# Altium PCB PCB2 (1).PcbDoc
Units mm, origin at the board's own origin, x right, y up, seen from the top; angles counter-clockwise.
Board outline 101.6 x 109.09 mm, 2 copper layers (Top Layer, Bottom Layer); 25 components, 22 nets, 119 pads, 0 vias.
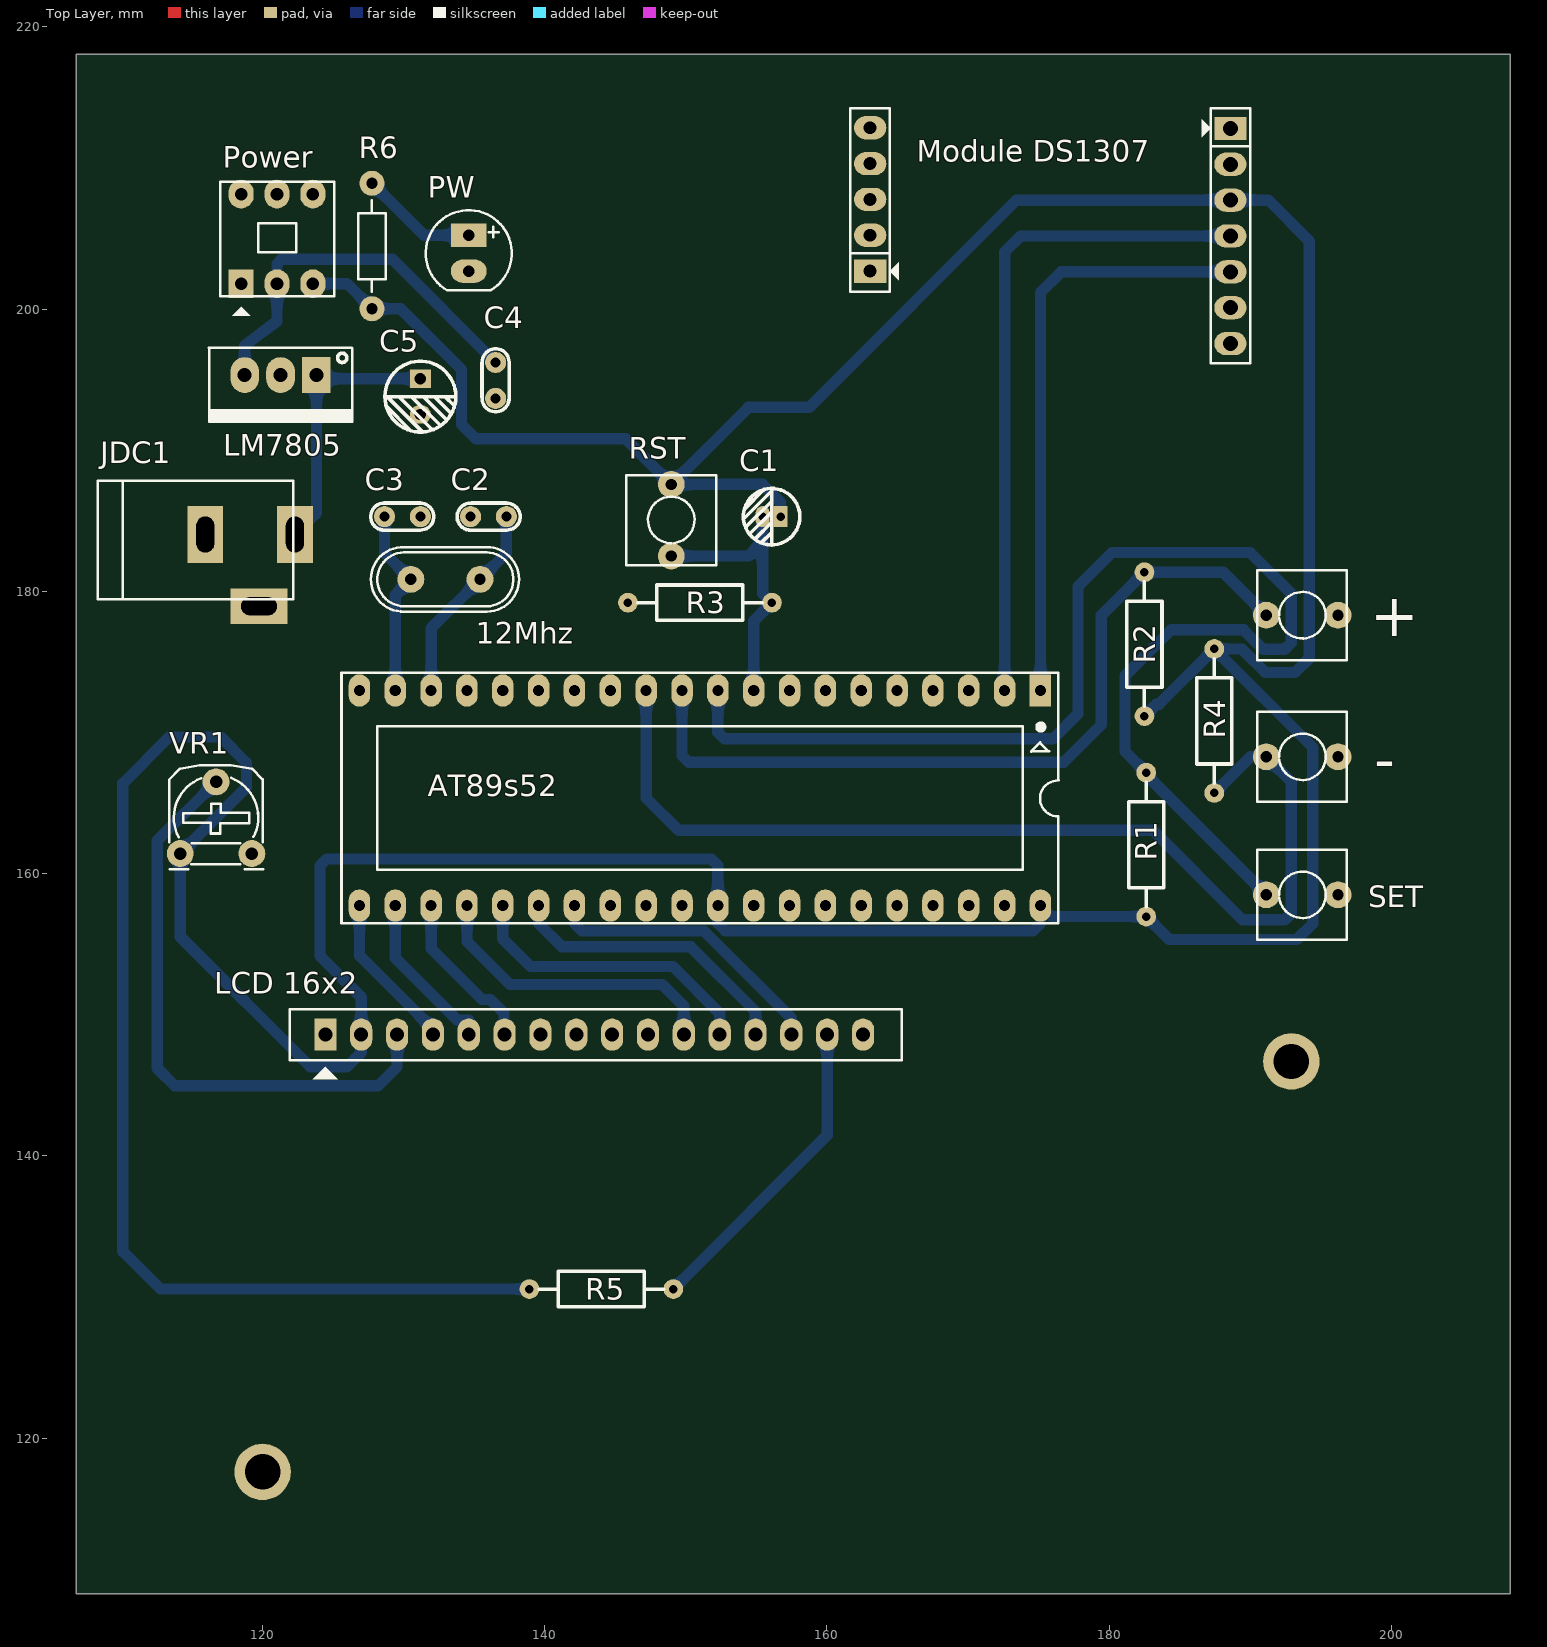
[diagram p0: Top Layer view]
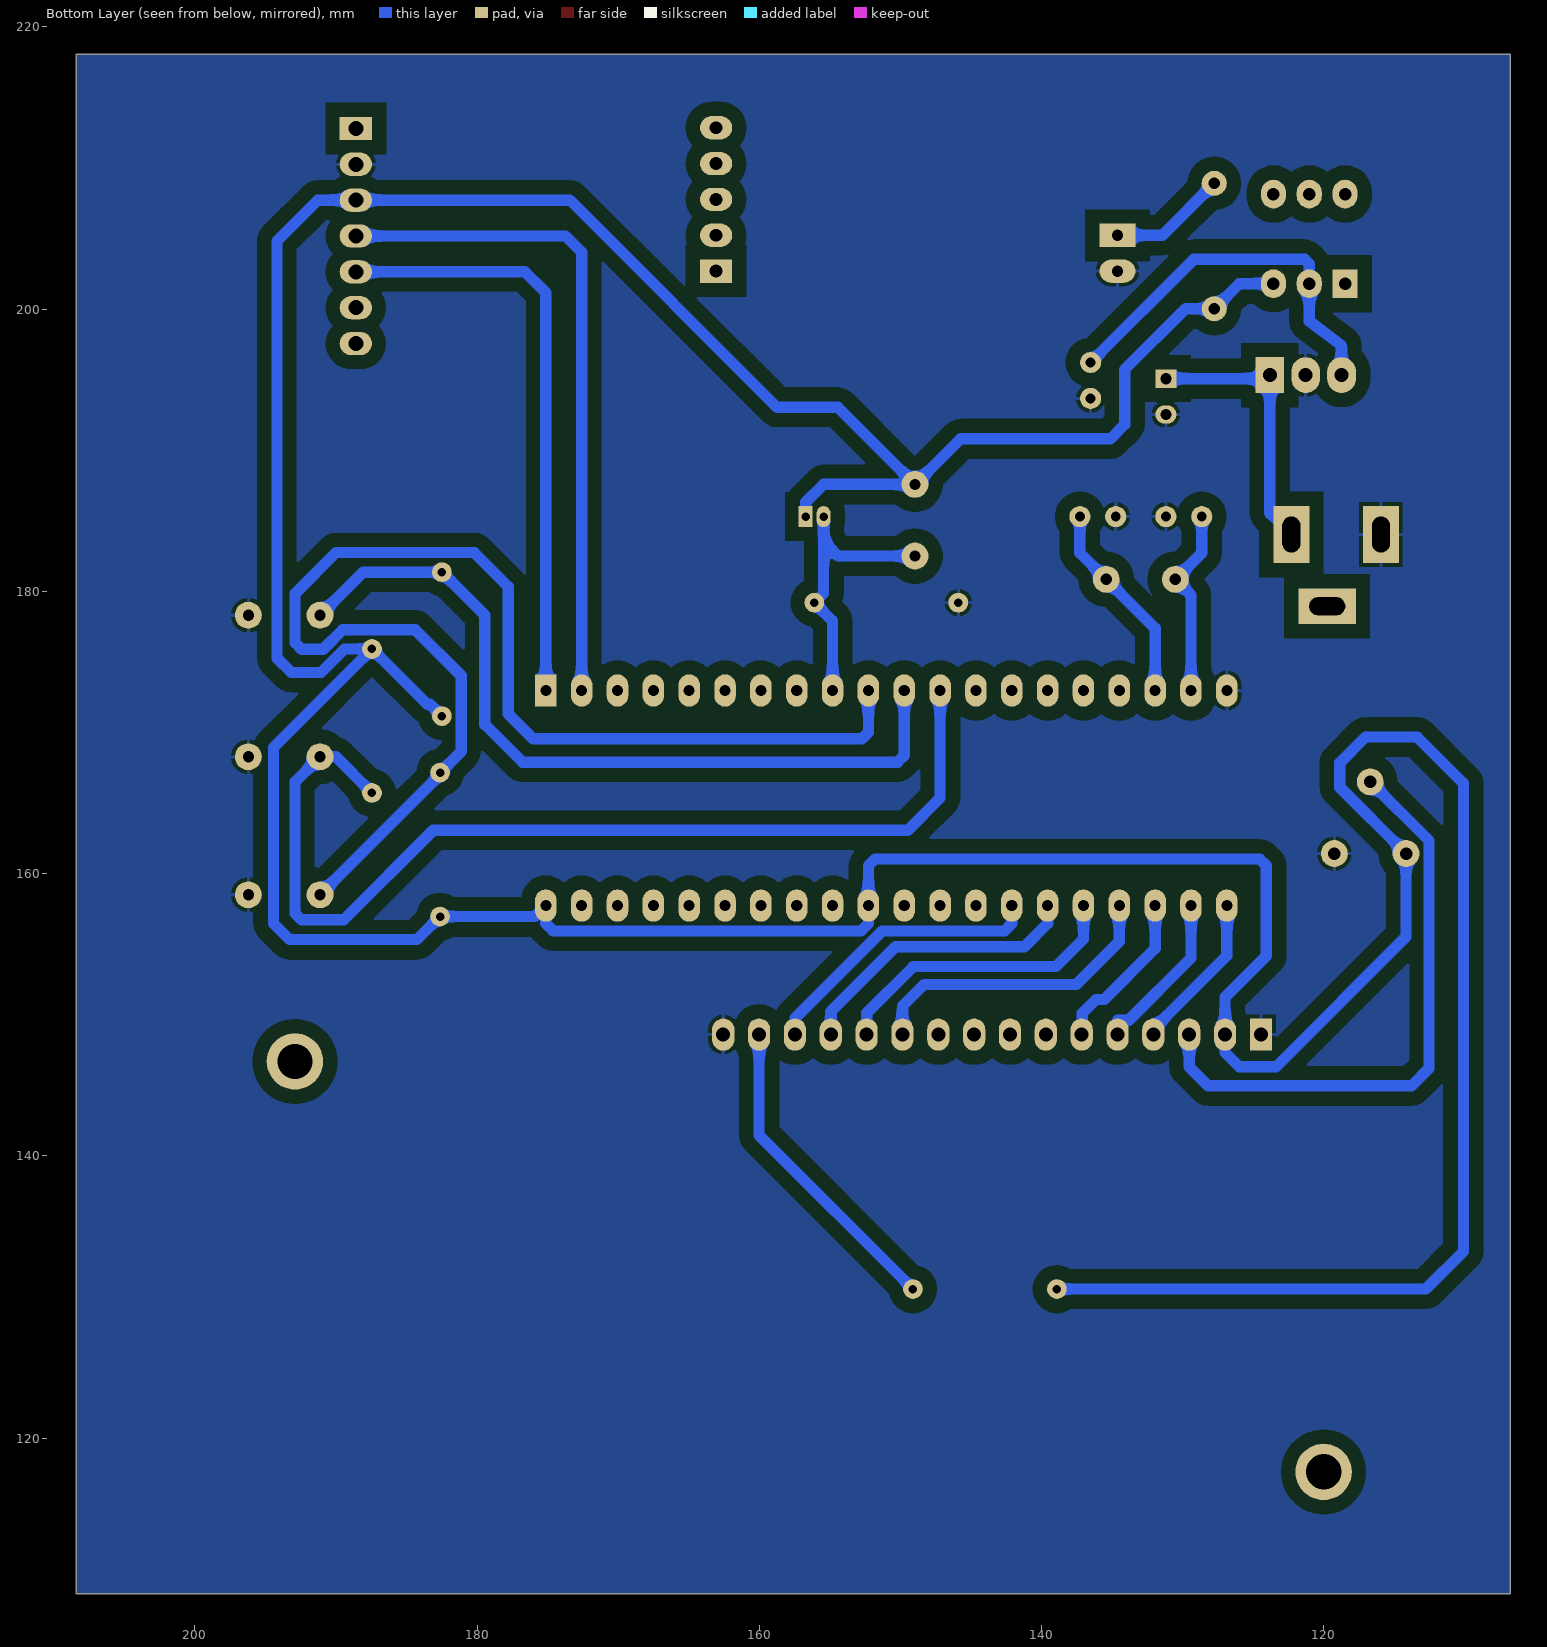
[diagram p1: Bottom Layer view, seen from below]
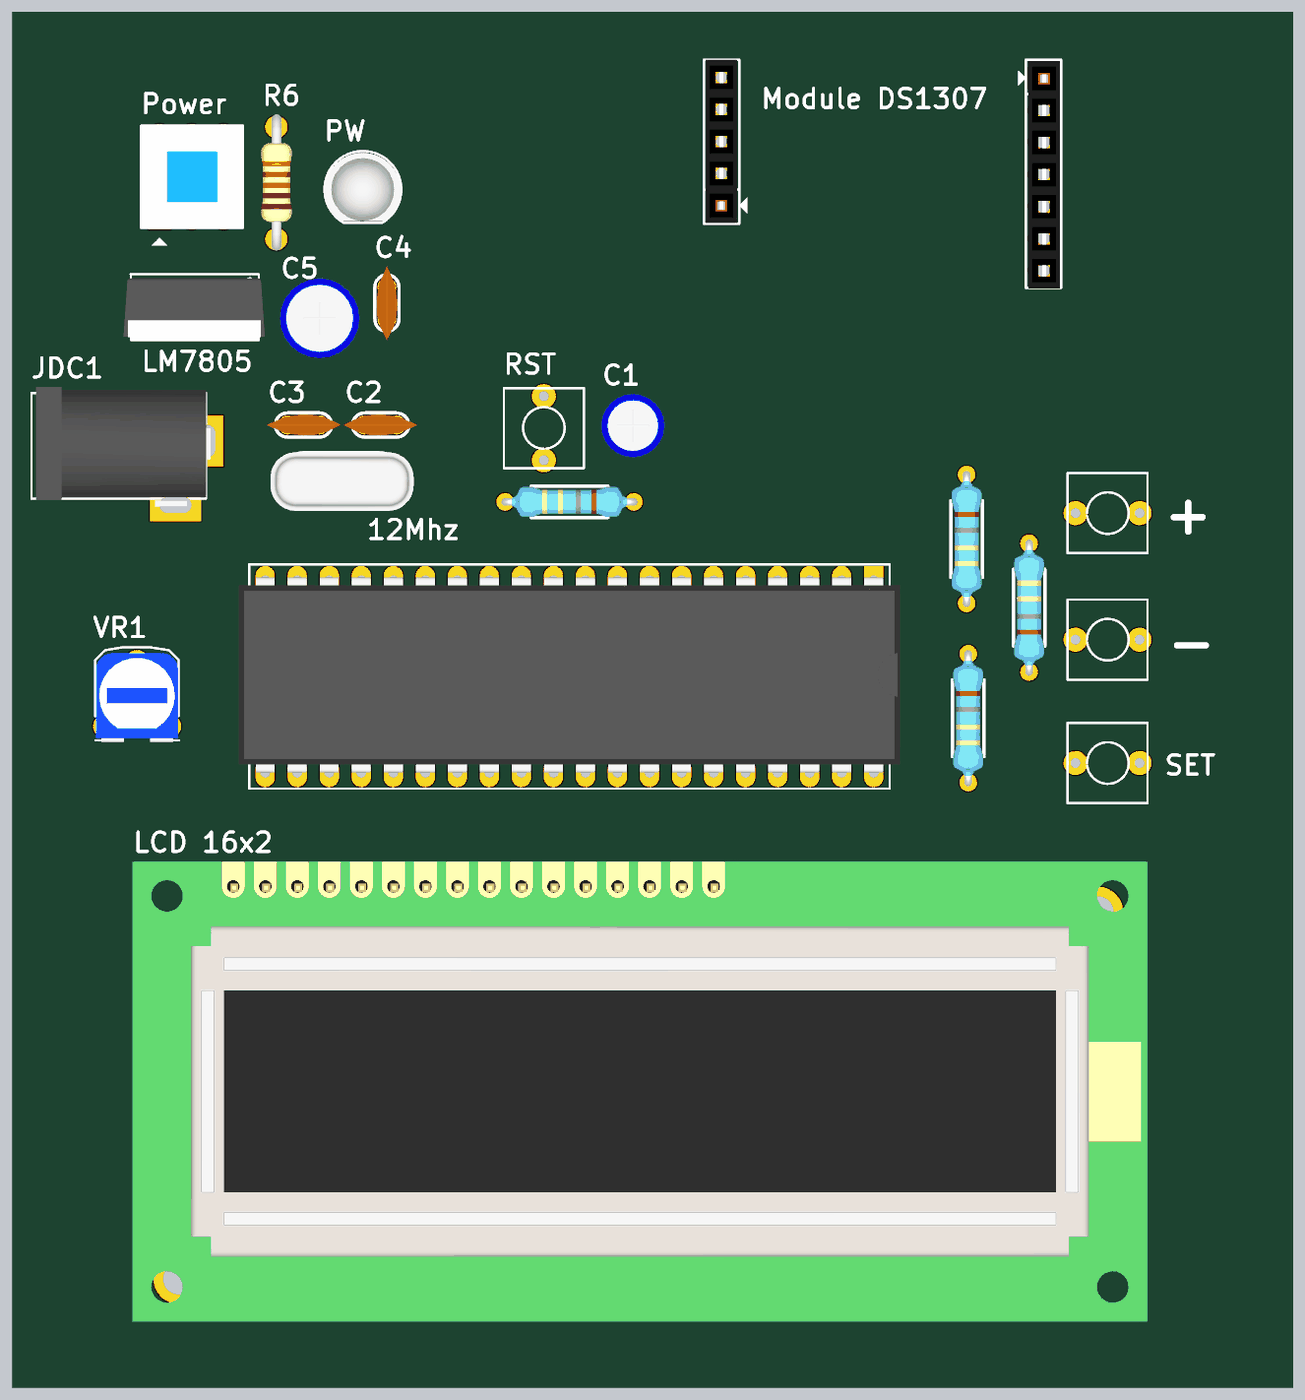
[diagram p2: 3D render of the assembled board from above, using the file's embedded part models]

## Layer stack, top to bottom
Top Solder: solder mask 0.0102, Solder Resist, Dk 3.5
Top Layer: signal copper 0.0356
Dielectric 1: dielectric 0.32, FR-4, Dk 4.8
Bottom Layer: signal copper 0.0356
Bottom Solder: solder mask 0.0102, Solder Resist, Dk 3.5

## Board outline
106.807,218.059 106.807,108.966 208.407,108.966 208.407,218.059

## Design rules (kind name [scope] priority, off if disabled: settings)
Clearance [All] p1: gap=0.2 ignorepadtopadclearanceinfootprint=FALSE
PolygonConnect [All] p1: connectstyle=Relief reliefconductorwidth=0.254 reliefentries=4 polygonreliefangle="90 Angle" airgapwidth=0.254
RoutingLayers [All] p1: top layer_v5=FALSE bottom layer_v5=TRUE
RoutingVias [All] p1: holewidth=0.711 width=1.27 viastyle="Through Hole" minholewidth=0.711 minwidth=1.27 maxholewidth=0.711 maxwidth=1.27
SolderMaskExpansion [All] p1: expansion=0.102 istentingtop=FALSE
Width [All] p1: maxlimit=0.8 minlimit=0.254 preferedwidth=0.8
29 further rules are at their usual default settings.

## Classes and differential pairs
component class Sheet2: C1 C2 C3 C4 C5 JDC1 R1 R2 R3 R4 R5 R6 VR1

## Components (designator, comment, footprint, x,y, rotation, side; value= is the part's Value field where it differs from the comment)
12Mhz "11Mhz" "Thach Anh 2 chan cam" 132.969,180.848 r0 top value=4Mhz (schematic designator Y1)
+ "SW" SW2 196.215,178.308 r180 top value="SW chip 2 pin" (schematic designator SW3)
- "SW" SW2 196.215,168.275 r180 top value="SW chip 2 pin" (schematic designator SW4)
AT89s52 "AT89S52" DIP40/W0.6 175.133,172.974 r180 top (schematic designator IC1)
C1 "10uF" "tu hoa 4mm" 156.083,185.293 r180 top
C2 "30pF" "tu gom" 136.017,185.293 r180 top
C3 "30pF" "tu gom" 129.921,185.293 r0 top
C4 "104" "tu gom" 136.525,194.945 r270 top
C5 "22uF" "tu hoa 5mm" 131.191,193.802 r270 top
JDC1 "Jack DC" DC-IN 119.126,181.483 r0 top value="Jac DC"
JP2 "JP5 PIN" JP5_1 163.068,202.692 r90 top value=JP5
"LCD 16x2" "LCD1602 XL" "LCD1602 with Jump" 124.46,148.59 r0 top (schematic designator LCD1)
LM7805 "LM7805" QTO-220 123.825,195.326 r180 top (schematic designator IC2)
"Module DS1307" "JP7 PIN" JP7_1 188.595,212.801 r270 top value=JP7 (schematic designator JP1)
Power "SW6A" SW6 118.491,201.803 r90 top value=SW6 (schematic designator SW5)
PW "LED" LED-5-RED 134.62,205.232 r270 top value="LED 3 ly Single Colour" (schematic designator LED1)
R1 "10K" "tro vach 1/4w" 182.626,162.052 r90 top
R2 "10K" "tro vach 1/4w" 182.499,176.256 r90 top
R3 "10k" "tro vach 1/4w" 151.003,179.197 r0 top
R4 "10K" "tro vach 1/4w" 187.452,170.815 r270 top
R5 "220R" "tro vach 1/4w" 144.018,130.556 r0 top
R6 "1k" R1/4W 127.762,208.915 r270 top value="R1/4W - 1K"
RST "SW" SW2 148.971,187.579 r270 top value="SW chip 2 pin" (schematic designator SW2)
SET "SW" SW2 196.215,158.496 r180 top value="SW chip 2 pin" (schematic designator SW1)
VR1 "1K" "Bien Tro Tam Giac Dung" 114.173,161.417 r0 top

## Footprints (in the part's own frame and the unit in brackets; to place one, negate y for a bottom-side part, rotate by r counter-clockwise, add the part's x,y. Pads: shape width x height; smd on the part's side, far side on the other; paste and mask are expansions set on the pad)
"Bien Tro Tam Giac Dung" [mil] "RM065"
  round 75 hole 35: 1(0,0) 2(100,200) 3(200,0)
  silkscreen extent -31,-44 231,246, body extent -28,-50 228,228, height 279
DC-IN [mil] "Jac DC input"
  rect 100x160 hole 50 slot 100 at 90 deg: 1(125,100) 2(-125,100)
  rect 160x100 hole 50 slot 100 at 0 deg: 3(25,-100)
  silkscreen extent -425,-80 120,250, body extent -410,-105 134,269, height 434
DIP40/W0.6 [mil] "40 PIN, W 600mil, Pin to pin 100mil"
  rect 60x90 hole 31: 1(0,0)
  oval 60x90 hole 31: 2(100,0) 3(200,0) 4(300,0) 5(400,0) 6(500,0) 7(600,0) 8(700,0) 9(800,0) 10(900,0) 11(1000,0) 12(1100,0) 13(1200,0) 14(1300,0) 15(1400,0) 16(1500,0) 17(1600,0) 18(1700,0) 19(1800,0) 20(1900,0) 21(1900,600) 22(1800,600) 23(1700,600) 24(1600,600) 25(1500,600) 26(1400,600) 27(1300,600) 28(1200,600) 29(1100,600) 30(1000,600) 31(900,600) 32(800,600) 33(700,600) 34(600,600) 35(500,600) 36(400,600) 37(300,600) 38(200,600) 39(100,600) 40(0,600)
  silkscreen extent -50,-50 1950,650, body extent -82,-10 1982,600, height 224
JP5_1 [mil] "JP5"
  rect 65x90 hole 36: 1(0,0)
  oval 65x90 hole 36: 2(100,0) 3(200,0) 4(300,0) 5(400,0)
  silkscreen extent -57,-80 455,55, body extent -55,-48 455,50, height 366
JP7_1 [mil] "JP7"
  rect 65x90 hole 42: 1(0,0)
  oval 65x90 hole 42: 2(100,0) 3(200,0) 4(300,0) 5(400,0) 6(500,0) 7(600,0)
  silkscreen extent -57,-80 655,55, body extent -53,-47 657,51, height 366
"LCD1602 with Jump" [mil] "LCD dipslay 16x2, 16 pin"
  rect 62x90 hole 39: 1(0,0)
  oval 62x90 hole 39: 2(100,0) 3(200,0) 4(300,0) 5(400,0) 6(500,0) 7(600,0) 8(700,0) 9(800,0) 10(900,0) 11(1000,0) 12(1100,0) 13(1200,0) 14(1300,0) 15(1400,0) 16(1500,0)
  silkscreen extent -100,-125 1608,70, body extent -320,-1353 2850,84, height 764
LED-5-RED [mil] "LED 2 PIN, 5 ly , Only colour,pin to pin 100mil"
  rect 65x100 hole 32: 1(0,0)
  oval 65x100 hole 32: 2(100,0)
  silkscreen extent -70,-120 154,120, body extent -65,-119 149,118, height 339
QTO-220 [mil] "TO-220 - 1-2-3"
  rect 80x100 hole 39: 1(0,0)
  oval 80x100 hole 39: 2(100,0) 3(200,0)
  silkscreen extent -100,-76 300,130, body extent -119,-64 322,121, height 755
R1/4W [mil] "R 1/4W, 2 Pin, 350mil"
  round 70 hole 31: 1(0,0) 2(350,0)
  silkscreen extent 48,-38 302,38, body extent -40,-47 386,47, height 111
SW2 [mil] "SW button 2pin, 250x 250 mil"
  round 75 hole 31: 1(0,0) 2(200,0)
  silkscreen extent -25,-125 225,125
SW6 [mil] "SW DTDP - 6Pin 260x300x300 mil"
  rect 80x70 hole 35: 1(0,0)
  oval 80x70 hole 35: 2(0,-100) 3(0,-200) 4(250,-200) 5(250,-100) 6(250,0)
  silkscreen extent -90,-260 285,58, body extent -33,-259 281,55, height 532
"Thach Anh 2 chan cam" [mm]
  round 1.905 hole 0.8: 1(-2.45,0) 2(2.45,0)
  silkscreen extent -5.28,-2.29 5.21,2.29, body extent -5.68,-2.36 5.68,2.29, height 3.5
"tro vach 1/4w" [mm]
  round 1.4 hole 0.6: 1(-5.1,0) 2(5.1,0)
  silkscreen extent -4.39,-1.25 4.42,1.25, body extent -5.38,-1.2 5.38,1.2, height 2.41
"tu gom" [mm] "Tu gom mini"
  round 1.5 hole 0.7: 1(-1.27,0) 2(1.27,0)
  silkscreen extent -2.25,-0.97 2.22,0.97, body extent -2.92,-0.85 2.92,0.85, height 6.12
"tu hoa 4mm" [mm]
  rect 1x1.5 hole 0.6: 1(-0.635,0)
  oval 1x1.5 hole 0.6: 2(0.635,0)
  silkscreen extent -2,-2 2.01,2.01, body extent -2.47,-2.47 2.58,2.58, height 14.81
"tu hoa 5mm" [mm]
  rect 1.3x1.5 hole 0.8: 1(-1.27,0)
  oval 1.3x1.5 hole 0.8: 2(1.27,0)
  silkscreen extent -2.51,-2.51 2.51,2.51, body extent -3.12,-3.18 3.23,3.18, height 14.55

## Part data
12Mhz: library part "Thach Anh 2 chan Cam", "Crystal For all Crystal 2pin."
+ - RST SET: library part SW2, "Switch button 2 pin"
AT89s52: "AT89S52, 8k Byte Flash Memory , 40 Pin"
C1: library part "Tu Hoa 10uF 25V 4x7", "Cắm", Chung_Loai=Cắm, Don_Vi=Con, Ma_Hang=MH001349, So_Chan=2, Ten_Linh_Kien="Tụ Hóa 10uF 25V 4x7MM"
C2 C3: library part "Tu gom 30pF 50V", "Cắm", Chung_Loai=Cắm, Don_Vi=Con, Ma_Hang=MH004772, So_Chan=2, Ten_Linh_Kien="Tụ gốm 30P"
C4: library part "Tu gom 104 50V", "Cắm", Chung_Loai=Cắm, Don_Vi=Con, Ma_Hang=MH004761, So_Chan=2, Ten_Linh_Kien="Tụ gốm 104 100nF 50V"
C5: library part "Tu Hoa 22uF 50V 5x10", "Cắm", Chung_Loai=Cắm, Don_Vi=Con, Ma_Hang=MH001359, So_Chan=2, Ten_Linh_Kien="Tụ Hóa 22uF 50V"
JDC1: library part DCIN, "Jac DC input"
JP2: library part JP5
"LCD 16x2": "LCD 1602 Xanh Lá", CHIP=HD44780, Ma_Hang=67HZ, NCC=NSHOP, Ten="Màn hình LCD 1602 Xanh Lá"
LM7805: library part LM78xx, "On ap +, from + 5 to + 24VDC"
"Module DS1307": library part JP7
Power: "SW-DTDP - 6 Pin"
PW: "LED Single colour Green and Red"
R1 R2 R4 R5: library part "Tro Vach 1/4W 5% 220R", "Cắm", Chung_Loai=Cắm, Don_Vi=Con, Ma_Hang=MH007300, So_Chan=2, Ten_Linh_Kien="Trở Vạch 1/4w 5% 220R"
R3: library part "Tro Vach 1/4W 5% 10k", "Căm", Chung_Loai=Cắm, Don_Vi=Con, Ma_Hang=MH007354, So_Chan=2, Ten_Linh_Kien="Trở Vạch 1/4w 5% 10K"
R6: library part R1/4W, "Resistor 1/4W"
VR1: library part "Bien tro tam giac 1K Dung", "Cắm", Chung_Loai=Cắm, Don_Vi=Con, Ma_Hang=MH003709, Ten_Linh_Kien="Biến Trở Tam Giác 102-1K RM065"

## Free pads (board coordinates)
  round 4 hole 2.5: 8(120.015,117.602) 8(192.913,146.685)

## Nets (pads, with @x,y where several pads share a name; then routed paths per layer and width w, separated by ;. In a path a pad name is that pad's centre, name@x,y a point inside that pad or via, vN(x,y) a via of type N, cw(c..) or ccw(c..) an arc to the next point about the centre after c; other vN are vias at no path point)
D4: "LCD 16x2.11" AT89s52.24 | length 21.8
  Bottom Layer w0.8: AT89s52.24 134.493,155.194 137.541,152.146 148.336,152.146 149.86,150.622 149.86,148.59
D5: "LCD 16x2.12" AT89s52.25 | length 21.4
  Bottom Layer w0.8: AT89s52.25 137.033,155.372 138.989,153.416 149.085,153.416 152.4,150.101 152.4,148.59
D6: "LCD 16x2.13" AT89s52.26 | length 20.9
  Bottom Layer w0.8: AT89s52.26 139.573,156.464 141.224,154.813 150.343,154.813 154.94,150.216 154.94,148.59
D7: "LCD 16x2.14" AT89s52.27 | length 20.6
  Bottom Layer w0.8: AT89s52.27 142.113,156.464 142.64,155.937 151.289,155.937 157.48,149.746 157.48,148.59
DOWN: -.2 AT89s52.12 R4.2 | length 73.7
  Bottom Layer w0.8: AT89s52.12 147.193,165.354 149.479,163.068 183.109,163.068 189.459,156.718 192.444,156.718 192.913,157.187 192.913,166.497 -.2 190.012,168.275 R4.2
EN: "LCD 16x2.6" AT89s52.23 | length 11.6
  Bottom Layer w0.8: AT89s52.23 131.953,154.686 135.56,151.079 136.144,151.079 137.113,150.11 137.113,148.637 137.16,148.59
GND: "LCD 16x2.1" "LCD 16x2.16" "Module DS1307.2" +.1 -.1 AT89s52.20 C2.2 C3.2 C4.2 C5.2 JDC1.2 LM7805.2 PW.2 R3.1 SET.1 VR1.3
NetC2_1: 12Mhz.2 AT89s52.18 C2.1 | length 14.5
  Bottom Layer w0.8: AT89s52.18 131.953,177.382 12Mhz.2 137.287,182.716 C2.1
NetC3_1: 12Mhz.1 AT89s52.19 C3.1 | length 13.6
  Bottom Layer w0.8: C3.1 128.651,182.716 12Mhz.1 129.413,179.742 AT89s52.19
NetC4_1: C4.1 LM7805.3 Power.2 | length 27.7
  Bottom Layer w0.8: LM7805.3 118.745,197.409 121.031,199.136 Power.2 121.031,203.2 121.361,203.53 129.21,203.53 C4.1
NetC5_1: C5.1 JDC1.1 LM7805.1 | length 19.3
  Bottom Layer w0.8: JDC1.1 123.825,185.547 LM7805.1@123.825,195.072 ; LM7805.1 LM7805.1@123.825,195.072 ; C5.1 LM7805.1@123.825,195.072
NetLCD1_15: "LCD 16x2.15" R5.2 | length 22.5
  Bottom Layer w0.8: R5.2 160.02,141.458 160.02,148.59
NetLED1_1: PW.1 R6.1 | length 8.4
  Bottom Layer w0.8: R6.1 131.445,205.232 PW.1
RS: "LCD 16x2.4" AT89s52.21 | length 11.3
  Bottom Layer w0.8: AT89s52.21 126.873,154.184 132.08,148.977 132.08,148.59
RST: AT89s52.9 C1.2 R3.2 RST.2 | length 20
  Bottom Layer w0.8: RST.2 154.432,182.499 155.448,183.515 ; AT89s52.9 154.813,177.907 R3.2 155.448,179.852 155.448,183.515 ; C1.2 155.448,183.515
RW: "LCD 16x2.5" AT89s52.22 | length 11.8
  Bottom Layer w0.8: AT89s52.22 129.413,154.013 133.82,149.606 134.62,149.606 134.62,148.59
SCL: "Module DS1307.5" AT89s52.1 | length 42.3
  Bottom Layer w0.8: AT89s52.1 175.133,201.168 176.606,202.641 188.595,202.641
SDA: "Module DS1307.4" AT89s52.2 | length 47.5
  Bottom Layer w0.8: AT89s52.2 172.593,204.038 173.736,205.181 188.595,205.181
SET: AT89s52.10 R1.2 SET.2 | length 92.8
  Bottom Layer w0.8: AT89s52.10 152.273,170.014 152.742,169.545 176.022,169.545 177.8,171.323 177.8,180.34 180.213,182.753 189.992,182.753 192.913,179.832 192.913,176.364 192.444,175.895 190.909,175.895 189.535,177.269 184.381,177.269 181.127,174.015 181.127,168.651 R1.2 182.626,167.005 SET.2
UP: +.2 AT89s52.11 R2.2 | length 57.6
  Bottom Layer w0.8: AT89s52.11 149.733,168.363 150.202,167.894 176.79,167.894 179.451,170.555 179.451,178.308 R2.2 188.087,181.356 +.2
VCC: "LCD 16x2.2" "Module DS1307.3" AT89s52.31 AT89s52.40 C1.1 Power.3 R1.1 R2.1 R4.1 R5.1 R6.2 RST.1 VR1.1 | length 362.1
  Bottom Layer w0.8: Power.3 125.984,201.803 R6.2 129.794,200.025 134.112,195.707 134.112,191.821 135.128,190.805 145.745,190.805 RST.1 ; R5.1 112.776,130.556 110.109,133.223 110.109,166.395 113.386,169.672 117.043,169.672 118.872,167.843 118.872,166.116 VR1.1 114.173,155.524 123.393,146.304 125.984,146.304 127,147.32 127,148.59 127,151.232 124.079,154.153 124.079,160.567 124.548,161.036 151.804,161.036 152.273,160.567 152.273,156.464 152.806,155.931 174.6,155.931 175.133,156.464 AT89s52.40 175.915,156.952 R1.1 184.257,155.321 193.294,155.321 194.437,156.464 194.437,168.93 R4.1 ; C1.1 156.718,186.309 155.448,187.579 RST.1 ; R2.1 183.349,172.006 183.543,172.006 R4.1 ; RST.1 154.432,193.04 158.75,193.04 173.431,207.721 188.595,207.721 191.287,207.721 194.183,204.826 194.183,175.26 193.167,174.244 191.069,174.244 189.398,175.915 R4.1
VEE: "LCD 16x2.3" VR1.2 | length 42.4
  Bottom Layer w0.8: VR1.2 112.547,162.331 112.547,146.202 113.792,144.958 128.194,144.958 129.54,146.304 129.54,148.59
pads on no net: "LCD 16x2.7" "LCD 16x2.8" "LCD 16x2.9" "LCD 16x2.10" "Module DS1307.1" "Module DS1307.6" "Module DS1307.7" AT89s52.3 AT89s52.4 AT89s52.5 AT89s52.6 AT89s52.7 AT89s52.8 AT89s52.13 AT89s52.14 AT89s52.15 AT89s52.16 AT89s52.17 AT89s52.28 AT89s52.29 AT89s52.30 AT89s52.32 AT89s52.33 AT89s52.34 AT89s52.35 AT89s52.36 AT89s52.37 AT89s52.38 AT89s52.39 JDC1.3 JP2.1 JP2.2 JP2.3 JP2.4 JP2.5 Power.1 Power.4 Power.5 Power.6

## Polygon pours and split planes (outlines as drawn)
GND on Bottom Layer "GND_L02_P000" (solid, pour order 0): 106.807,108.966 208.407,108.966 208.407,218.059 106.807,218.059